# Altium PCB io_shield.PcbDoc
Units mm, origin at the board's own origin, x right, y up, seen from the top; angles counter-clockwise.
Board outline 100 x 100 mm, 2 copper layers (Top Layer, Bottom Layer), stack 1.569 mm thick; 3 components, 0 nets, 1 pads, 1 vias.
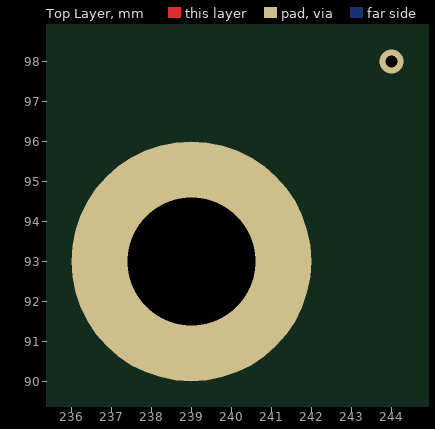
[diagram p0: Top Layer view]
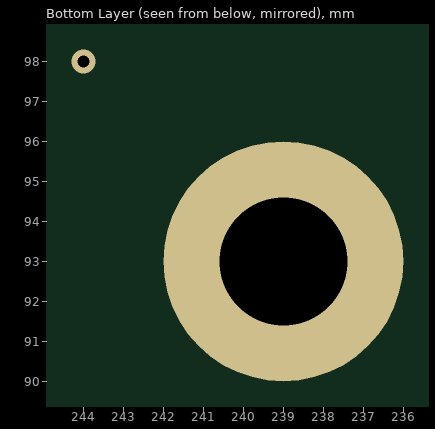
[diagram p1: Bottom Layer view, seen from below]

## Layer stack, top to bottom
Top Solder: solder mask 0.0254, SM-001, Dk 4
Top Layer: signal copper 0.035
Dielectric 1: core 1.4986, Core-043, Dk 4.3
Bottom Layer: signal copper 0.035
Bottom Solder: solder mask 0.0254, SM-001, Dk 4

## Board outline
229,83 229,183 329,183 329,83

## Design rules (kind name [scope] priority, off if disabled: settings)
Clearance [All] p1: gap=0.25 ignorepadtopadclearanceinfootprint=FALSE
ComponentClearance ComponentClearance_logo [HasFootprint('Develer_logo_30x12mm_PCB_NOTE') vs HasFootprint('Develer_logo_30x12mm_TB_Top')] p1: gap=0 collisioncheckmode=3 verticalgap=0 showdistances=FALSE
ComponentClearance [All] p2: gap=0.25 collisioncheckmode=3 verticalgap=0.25 showdistances=FALSE
DiffPairsRouting [All] p1: maxlimit=0.25 minlimit=0.25 mostfreqgap=0.25 toplayer_minwidth=0.25 toplayer_maxwidth=0.25 toplayer_prefwidth=0.25 bottomlayer_minwidth=0.25 bottomlayer_maxwidth=0.25 bottomlayer_prefwidth=0.25 maxuncoupledlength=0.25
Height [All] p1: minheight=0 maxheight=25 prefheight=12.5
HoleSize [All] p1: absolutevalues=TRUE maxlimit=10 minlimit=0.2 maxpercent=80.000 minpercent=20.000
HoleToHoleClearance [All] p1: gap=0.25 allowstackedmicrovias=TRUE
MinimumSolderMaskSliver [All] p1: minsoldermaskwidth=0.15
PlaneClearance [All] p1: clearance=0.5
PlaneConnect PlaneConnect_via [isvia] p1: planeconnectstyle=Direct reliefexpansion=0.508 reliefentries=4 reliefconductorwidth=0.254 reliefairgap=0.254
PlaneConnect [All] p2: planeconnectstyle=Relief reliefexpansion=0.6 reliefentries=4 reliefconductorwidth=0.6 reliefairgap=0.3
PolygonConnect PolygonConnect_via [isvia] p1: connectstyle=Direct reliefconductorwidth=0.254 reliefentries=4 polygonreliefangle="90 Angle" airgapwidth=0.254
PolygonConnect [All] p2: connectstyle=Relief reliefconductorwidth=0.6 reliefentries=4 polygonreliefangle="90 Angle" airgapwidth=0.6
RoutingCorners [All] p1: cornerstyle=45-Degree minsetback=2.5 maxsetback=2.5
RoutingVias [All] p1: holewidth=0.3 width=0.6 viastyle="Through Hole" minholewidth=0.2 minwidth=0.3 maxholewidth=0.5 maxwidth=1
SilkToSilkClearance [All] p1: silktosilkclearance=0.15
SilkToSolderMaskClearance [IsPad] p1: minsilkscreentomaskgap=0.15 clearancetoexposedcopper=TRUE
SolderMaskExpansion SolderMaskExpansion_via [isVia] p1: expansion=-10
SolderMaskExpansion [All] p2: expansion=0.05
UnRoutedNet [All] p1: checkbadconnections=TRUE
Width [All] p1: maxlimit=5 minlimit=0.15 preferedwidth=0.25
18 further rules are at their usual default settings.

## Components (designator, comment, footprint, x,y, rotation, side; value= is the part's Value field where it differs from the comment)
logo "Comment" DEVELER_TB_TOP 109.011,10 r180 top
logo "Comment" DEVELER_PCB_NOTE 311,10 r0 top
logo "Comment" DEVELER_TB_TOP 311,10 r0 top

## Footprints (in the part's own frame and the unit in brackets; to place one, negate y for a bottom-side part, rotate by r counter-clockwise, add the part's x,y. Pads: shape width x height; smd on the part's side, far side on the other; paste and mask are expansions set on the pad)
DEVELER_PCB_NOTE [mm]
DEVELER_TB_TOP [mm]

## Free pads (board coordinates)
  round 6 hole 3.2: Hole(239,93)

## Via types
v1: diameter 0.6, hole 0.3, Top Layer to Bottom Layer, tented both sides, 1 vias

## Nets (pads, with @x,y where several pads share a name; then routed paths per layer and width w, separated by ;. In a path a pad name is that pad's centre, name@x,y a point inside that pad or via, vN(x,y) a via of type N, cw(c..) or ccw(c..) an arc to the next point about the centre after c; other vN are vias at no path point)
copper on no net:
  other v1: 244,98

## Silkscreen, mask and mechanical layers (free items; w line width, h text height)
Top Overlay:
  text "REV..prj_pcb" at 274.5,243.5 h3
  text ".prj_name / .prj_status" at 277,205 h2
Bottom Overlay:
  text "REV..prj_pcb" at 289.25,240.5 h3
  text ".prj_name / .prj_status" at 296.75,201.75 h2
Outline:
  the board outline again, w0.25
Drawing:
  text "Mechanical Characteristics" at 348.5,24.5 h5
  text "Mechanical Characteristics" at 348.5,24.5 h5
Assembly Top:
  text "Assembly TOP" at 348.5,24.5 h5
Assembly Bottom:
  text "Assembly Bottom" at 71.5,24.75 h5
Note Top:
  text "Note TOP" at 348.5,24.5 h5
Note Bottom:
  text "Note Bottom" at 71.5,24.75 h5
PCB_Note:
  drawing of 238 lines, arcs and shapes, not listed
  text "NOTE:" at 16.5,274.25 h10
  text "- Layer: 4L" at 16.5,265 h5
  text "- Material: FR4 HTG" at 16.5,260 h5
  text "- Finishing: HASL" at 16.5,255 h5
  text "- Silkscreen: WHITE" at 16.5,250 h5
  text "- Solder mask color: GREEN" at 16.5,245 h5
  text "1" at 16.5,237.75 h3.5
  text "Intentional short-circuit" at 21.75,237.25 h5
  text "!! DELETE ME !!" at -93,188 h10
  text "2 Layers" at 73.25,136.75 h5
  text "File Layer names:" at 72.25,131.5 h3.5
  text "GTO" at 72.25,127.5 h3
  text "Top Overlay" at 81.25,127.5 h3
  text "GTP" at 72.25,124.5 h3
  text "Top Paste" at 81.25,124.5 h3
  text "GTS" at 72.25,121.5 h3
  text "Top Solder" at 81.25,121.5 h3
  text "GTL" at 72.25,118.5 h3
  text "Top Layer" at 81.25,118.5 h3
  text "GBL" at 72.25,115.5 h3
  text "Bottom Layer" at 81.25,115.5 h3
  text "GBS" at 72.25,112.5 h3
  text "Bottom Solder" at 81.25,112.5 h3
  text "GBP" at 72.25,109.5 h3
  text "Bottom Paste" at 81.25,109.5 h3
  text "GBO" at 72.25,106.5 h3
  text "Bottom Overlay" at 81.25,106.5 h3
  text "GM1" at 72.25,100.5 h3
  text "Outline" at 81.25,100.5 h3
  text "GM7" at 72.25,97.5 h3
  text "PCB_Note" at 81.25,97.5 h3
  text "PAGE FORMAT: /  - A4  210 x 297 /  - A3  297 x 420 /  - A2 420 x 594 /  - A1 597x 841 /  / Change TitleBlock with correct page size.  / Remember to update page size in titleblock!!" at -93,81 h5
  text "Layer" at 13.142,59.75 h1.5
  text "Name" at 21.948,59.75 h1.5
  text "Material" at 41.166,59.75 h1.5
  text "Thickness" at 54.8,59.75 h1.5
  text "Constant" at 67.827,59.75 h1.5
  text "Board Layer Stack" at 80.246,59.75 h1.5
  text "Top Overlay" at 21.948,56.75 h1.5
  text "Top Solder" at 21.948,53.75 h1.5
  text "SM-001" at 41.166,53.75 h1.5
  text "0.025mm" at 54.8,53.75 h1.5
  text "4" at 67.827,53.75 h1.5
  text "1" at 13.142,50.75 h1.5
  text "Top Layer" at 21.948,50.75 h1.5
  text "Copper" at 41.166,50.75 h1.5
  text "0.035mm" at 54.8,50.75 h1.5
  text "Dielectric 1" at 21.948,47.75 h1.5
  text "Core-043" at 41.166,47.75 h1.5
  text "1.499mm" at 54.8,47.75 h1.5
  text "4.3" at 67.827,47.75 h1.5
  text "2" at 13.142,44.75 h1.5
  text "Bottom Layer" at 21.948,44.75 h1.5
  text "Copper" at 41.166,44.75 h1.5
  text "0.035mm" at 54.8,44.75 h1.5
  text "Bottom Solder" at 21.948,41.75 h1.5
  text "SM-001" at 41.166,41.75 h1.5
  text "0.025mm" at 54.8,41.75 h1.5
  text "4" at 67.827,41.75 h1.5
  text "Bottom Overlay" at 21.948,38.75 h1.5
  text "PCB Note" at 348.5,24.5 h5
  text "Board Name" at 348.5,19.95 h3
  text ".prj_name" at 364.5,19.95 h3
  text "P/N" at 348.5,16.45 h3
  text ".prj_pn" at 364.5,16.45 h3
  text "Author" at 348.5,12.95 h3
  text "AUTHOR" at 364.5,12.95 h3
  text "Date" at 348.5,9.35 h3
  text ".prj_date" at 364.5,9.35 h3
  text "Revision" at 348.5,5.75 h3
  text ".prj_pcb" at 364.5,5.75 h3
  text "A3" at 407,5.75 h3
Top TitleBlock:
  lines w0.3: 308,5 308,22.5 347.5,22.5 ; 347.5,5 347.5,17 ; 347.5,8.5 415,8.5 ; 347.5,12 415,12 ; 347.5,15.5 415,15.5 ; 347.5,16.45 347.5,19 ; 363.5,5 363.5,8.5 363.5,12 363.5,15.5 363.5,19 ; 405,5 405,8.5 ; 415,19 363.5,19 ; 415,22.5 363.5,22.5 ; 415,29.5 363.5,29.5 347.5,29.5 347.5,26 347.5,22.5 ; 347.5,19 363.5,19 ; 347.5,19 347.5,22.5 ; 347.5,22.5 363.5,22.5 ; 363.5,19 363.5,22.5 ; 0,0 0,295 420,295 420,0 0,0 ; 5,5 415,5 415,290 5,290 5,5
  text "Board Name" at 348.5,19.95 h3
  text ".prj_name" at 364.5,19.95 h3
  text "P/N" at 348.5,16.45 h3
  text ".prj_pn" at 364.5,16.45 h3
  text "Author" at 348.5,12.95 h3
  text "AUTHOR" at 364.5,12.95 h3
  text "Date" at 348.5,9.35 h3
  text ".prj_date" at 364.5,9.35 h3
  text "Revision" at 348.5,5.75 h3
  text ".prj_pcb" at 364.5,5.75 h3
  text "A3" at 407,5.75 h3
Bottom TitleBlock:
  lines w0.3: 5,8.5 72.5,8.5 ; 5,12 72.5,12 ; 5,15.5 72.5,15.5 ; 5,19 56.5,19 ; 5,22.5 56.5,22.5 ; 5,29.5 56.5,29.5 72.5,29.5 72.5,26 72.5,22.5 ; 15,5 15,8.5 ; 56.5,5 56.5,8.5 56.5,12 56.5,15.5 56.5,19 ; 72.5,5 72.5,17 ; 72.5,16.45 72.5,19 ; 112,5 112,22.5 72.5,22.5 ; 56.5,19 72.5,19 ; 56.5,19 56.5,22.5 ; 56.5,22.5 72.5,22.5 ; 72.5,19 72.5,22.5 ; 0,0 420,0 420,295 0,295 0,0 ; 5,5 415,5 415,290 5,290 5,5
  text ".prj_name" at 55.5,19.95 h3
  text "Board Name" at 71.5,19.95 h3
  text ".prj_pn" at 55.5,16.45 h3
  text "P/N" at 71.5,16.45 h3
  text "AUTHOR" at 55.5,12.95 h3
  text "Author" at 71.5,12.95 h3
  text ".prj_date" at 55.5,9.35 h3
  text "Date" at 71.5,9.35 h3
  text "A3" at 13,5.75 h3
  text ".prj_pcb" at 55.5,5.75 h3
  text "Revision" at 71.5,5.75 h3